# Altium PCB USB-SATA.pcbdoc
Units mm, origin at the board's own origin, x right, y up, seen from the top; angles counter-clockwise.
Board outline 74.37 x 105.1 mm, 4 copper layers (Top Layer, Inner1, Inner2, Bottom Layer); 58 components, 54 nets, 291 pads, 231 vias.
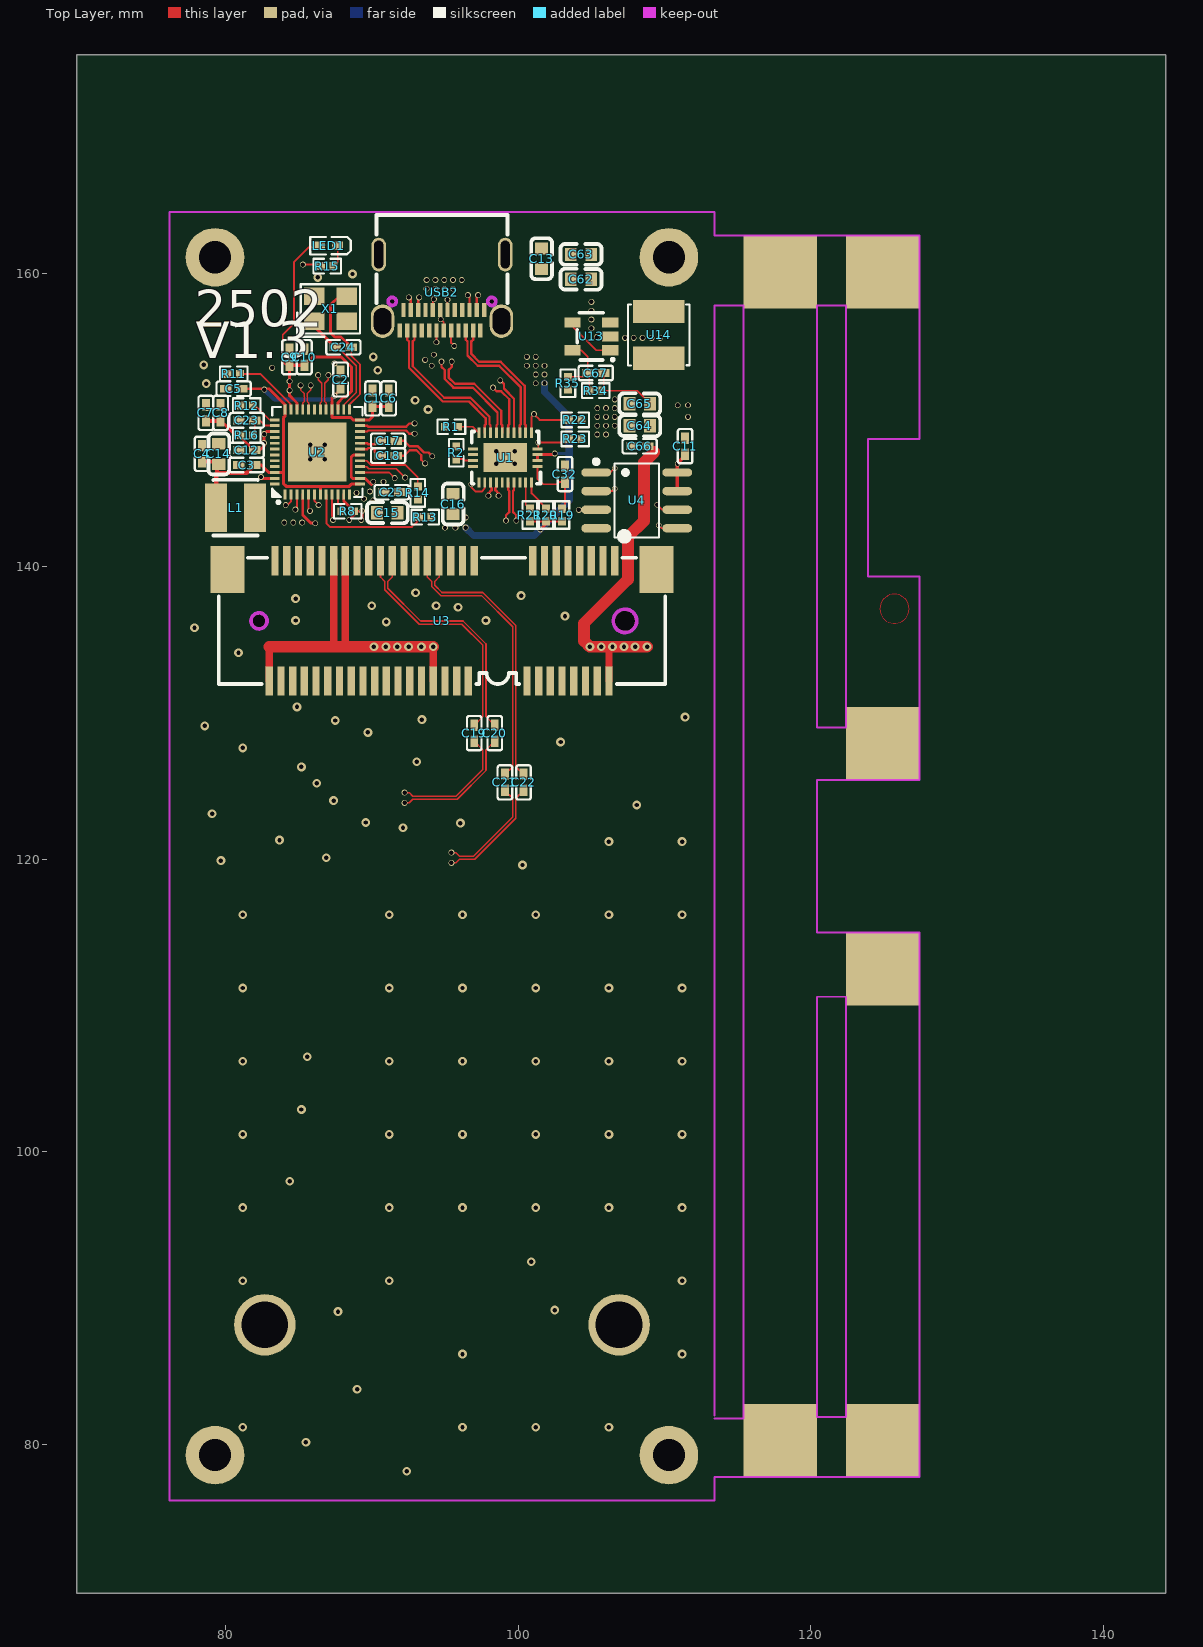
[diagram p0: Top Layer view]
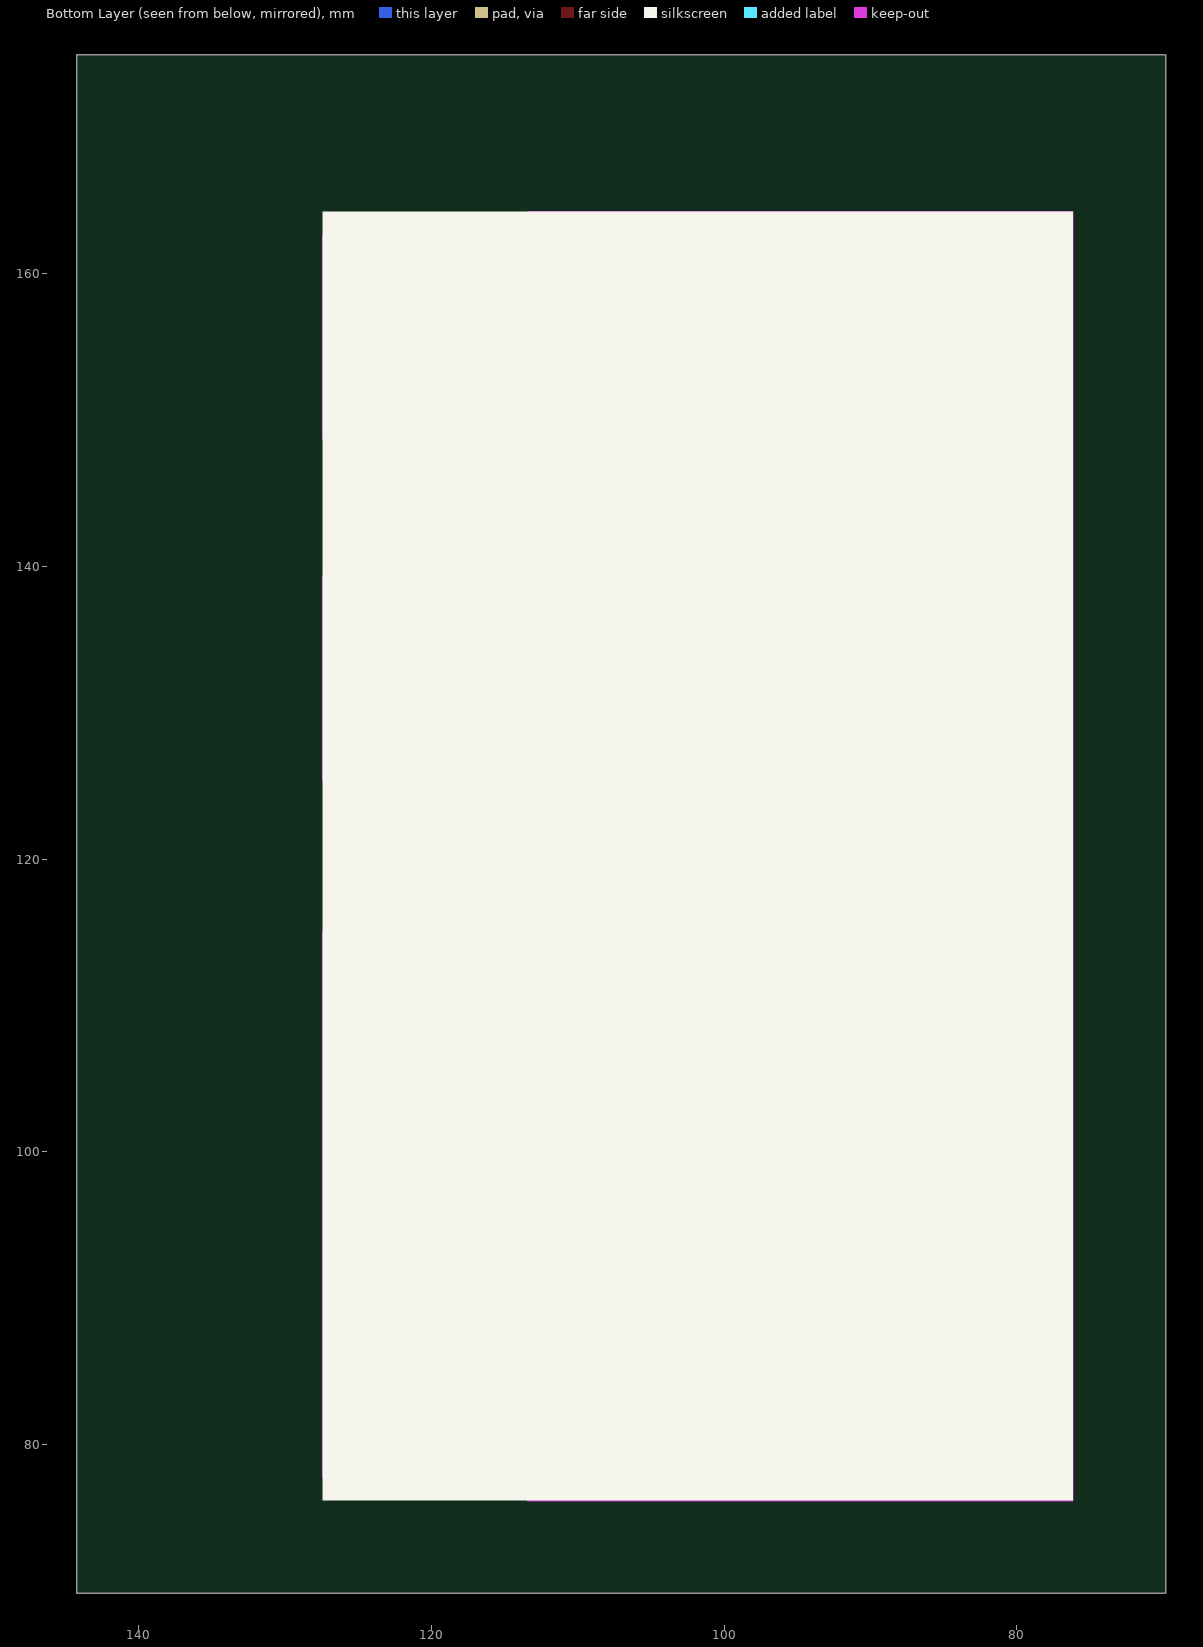
[diagram p1: Bottom Layer view, seen from below]
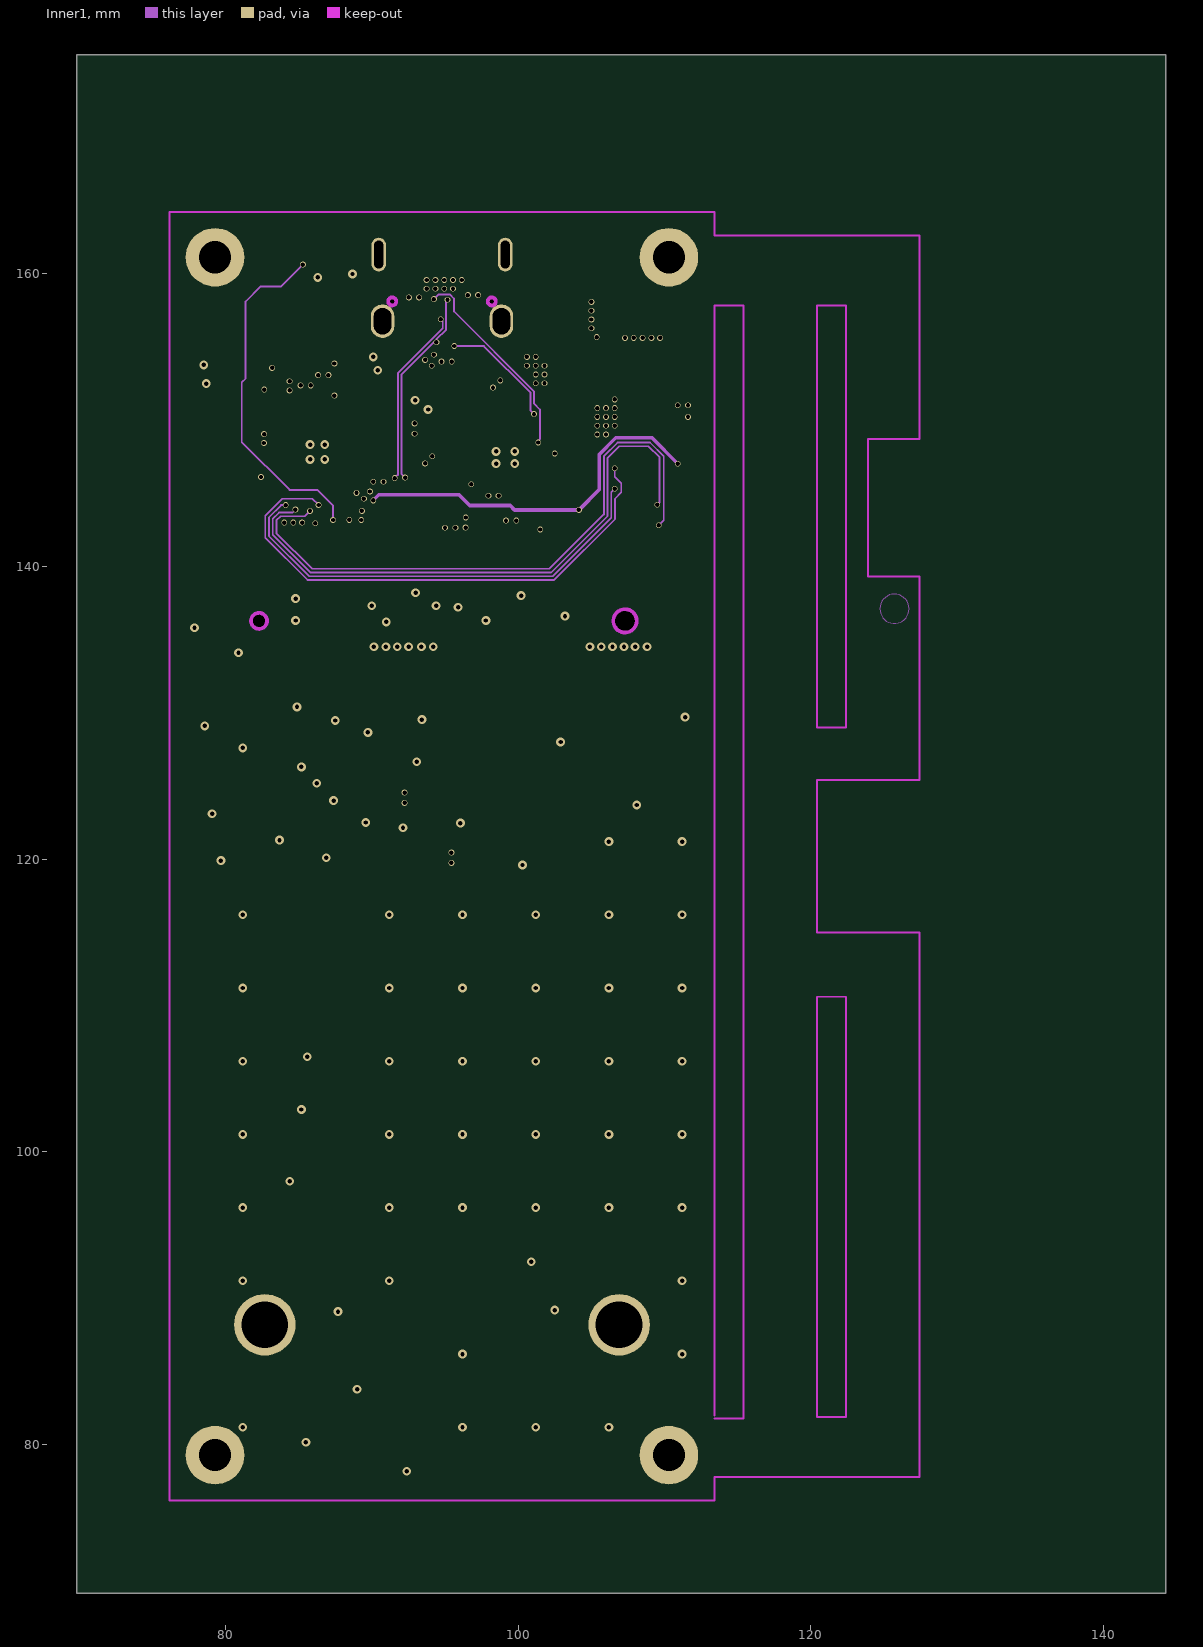
[diagram p2: Inner1]
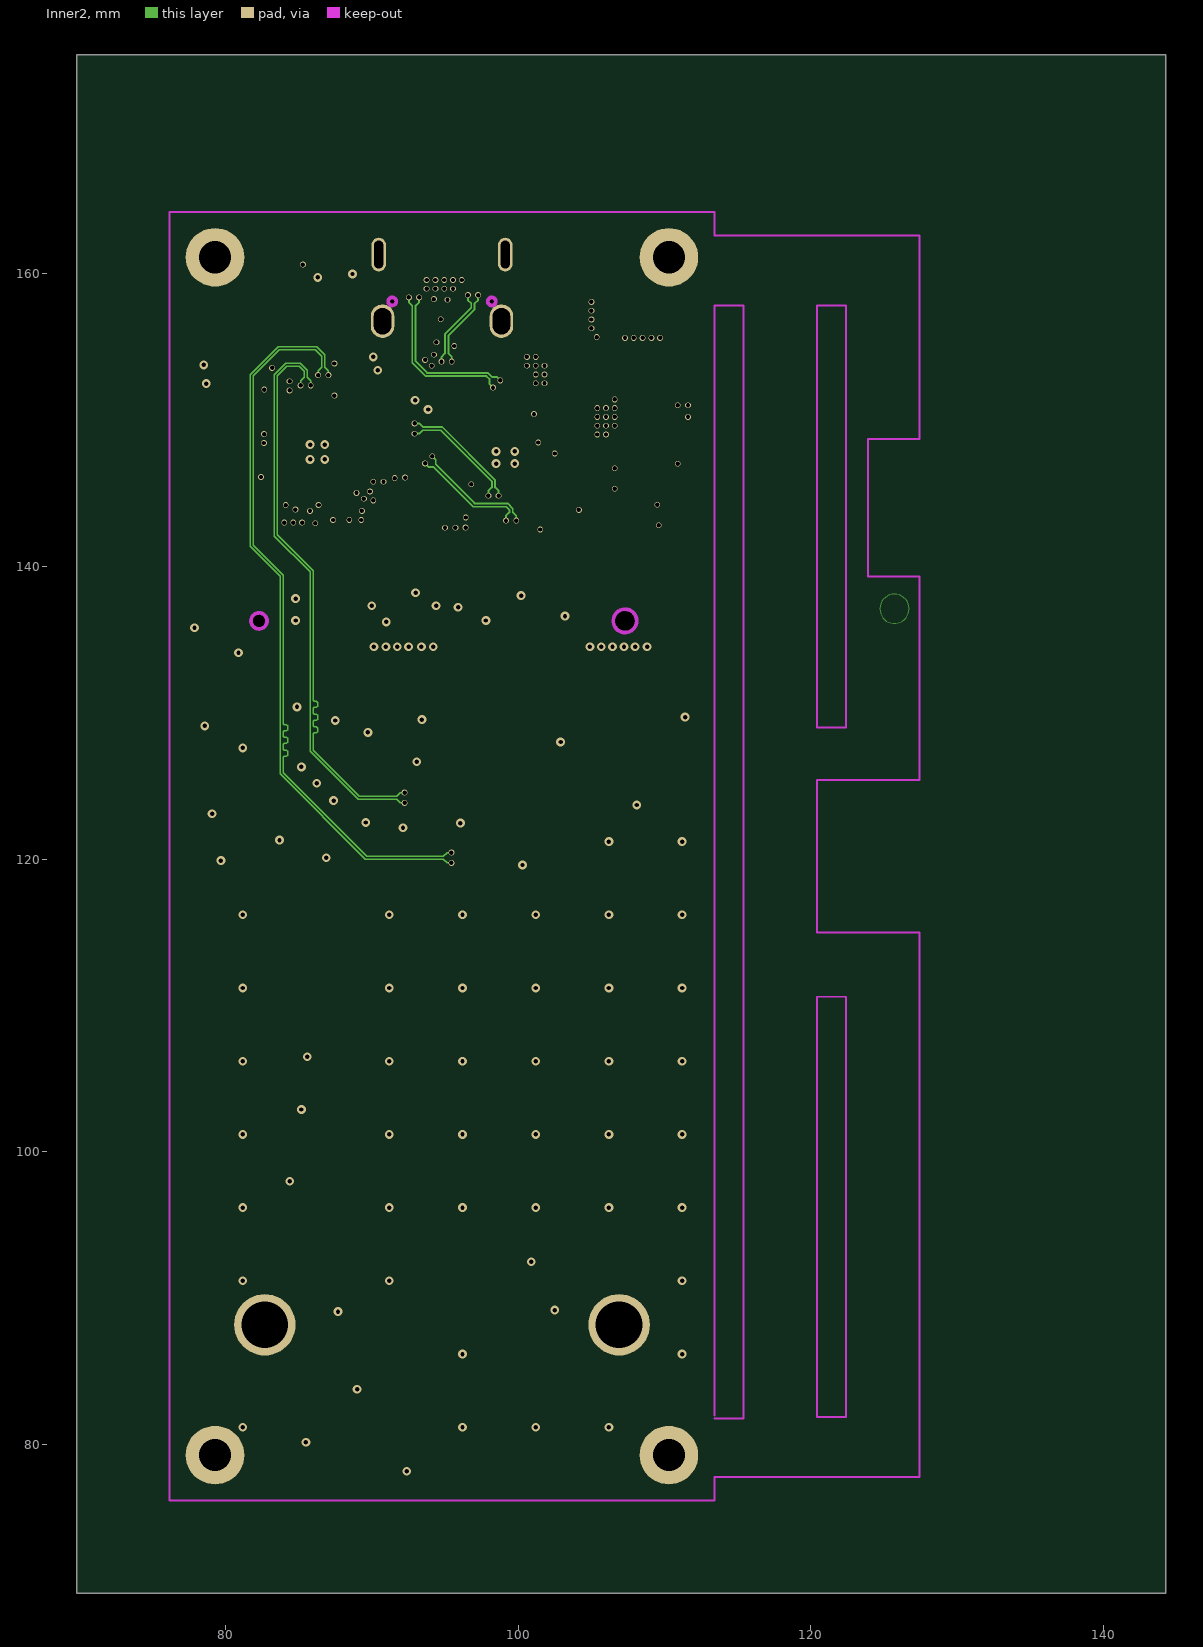
[diagram p3: Inner2]

## Layer stack, top to bottom
Top Layer: signal copper (thickness not stored)
Dielectric: dielectric 0.32, FR-4, Dk 4.8
Inner1: signal copper (thickness not stored)
Dielectric: dielectric 0.32, FR-4, Dk 4.8
Inner2: signal copper (thickness not stored)
Dielectric: dielectric 0.32, FR-4, Dk 4.8
Bottom Layer: signal copper (thickness not stored)

## Board outline
144.22,69.85 69.85,69.85 69.85,174.95 144.22,174.95

## Design rules (kind name [scope] priority, off if disabled: settings)
BoardOutlineClearance safeClearance [All] p0: genericclearance=0.254 ignorepadtopadclearanceinfootprint=FALSE except(0: Track-OutlineEdge SMDPad-OutlineEdge THPad-OutlineEdge Via-OutlineEdge Fill-OutlineEdge Region-OutlineEdge Poly-OutlineEdge Text-OutlineEdge Track-CutoutEdge SMDPad-CutoutEdge THPad-CutoutEdge Via-CutoutEdge Fill-CutoutEdge Region-CutoutEdge Arc-SplitContinuation Track-SplitContinuation SMDPad-SplitContinuation THPad-SplitContinuation Via-SplitContinuation Fill-SplitContinuation Poly-SplitContinuation Region-SplitContinuation Text-SplitContinuation)
Clearance safeClearance [(InNet('GND') OR InNet('CC2') OR InNet('5V') OR InNet('SSTX_P') OR InNet('SSTX_N') OR InNet('SSRX_P') OR InNet('SSRX_N') OR InNet('RX2_P') OR InNet('RX2_N') OR InNet('RX1_N') OR InNet('RX1_P') OR InNet('TX2_P') OR InNet('TX2_N') OR InNet('TX1_N') OR InNet('TX1_P') OR InNet('CC1') OR InNet('D+') OR InNet('D-') OR InNet('I2C_DATA') OR InNet('I2C_CLK') OR InNet('VCC33') OR InNet('GPIO5') OR InNet('GPIO4') OR InNet('VCC12') OR InNet('GPIO3') OR InNet('GPIO2') OR InNet('VBUS_DET') OR InNet('$1N7039') OR InNet('CHIP_SSTX_N') OR InNet('CHIP_SSTX_P') OR InNet('XI') OR InNet('XO') OR InNet('CHIP_SATA_RX_P') OR InNet('CHIP_SATA_RX_N') OR InNet('CHIP_SATA_TX_N') OR InNet('CHIP_SATA_TX_P') OR InNet('GPIO7') OR InNet('GPIO6') OR InNet('RST#') OR InNet('$1N7428') OR InNet('3V3') OR InNet('SATA_TX_P') OR InNet('SATA_TX_N') OR InNet('SATA_RX_N') OR InNet('SATA_RX_P') OR InNet('$1N7831') OR InNet('$1N23194') OR InNet('$1N23616') OR InNet('ATTACHED') OR InNet('VL_CE') OR InNet('CCLOAD0') OR InNet('CCLOAD1') OR InNet('SY1_FB') OR InNet('$1N31844'))] p1: gap=0.178 ignorepadtopadclearanceinfootprint=FALSE except(0: Track-Fill SMDPad-Fill THPad-Fill Via-Fill Fill-Fill Track-Region SMDPad-Region THPad-Region Via-Region Fill-Region Region-Region Track-Poly SMDPad-Poly THPad-Poly Via-Poly Fill-Poly Region-Poly Poly-Poly Track-Text SMDPad-Text THPad-Text Via-Text Fill-Text Region-Text Poly-Text Text-Text Track-Sheet SMDPad-Sheet THPad-Sheet Via-Sheet Fill-Sheet Region-Sheet Poly-Sheet Text-Sheet Track-Hole SMDPad-Hole THPad-Hole Via-Hole Fill-Hole Region-Hole Poly-Hole Text-Hole Sheet-Hole; 0.099: Track-Track Track-SMDPad SMDPad-SMDPad Track-THPad SMDPad-THPad THPad-THPad Track-Via SMDPad-Via THPad-Via; 0.3: Via-Via)
DiffPairsRouting differentialPair [All] p1: maxuncoupledlength=39.4094 minlimit=3.937 maxlimit=3.937 mostfreqgap=3.937 toplayer_minwidth=3.937 toplayer_prefwidth=3.937 toplayer_maxwidth=100 bottomlayer_minwidth=3.937 bottomlayer_prefwidth=3.937 bottomlayer_maxwidth=100 midlayer1_minwidth=3.937 midlayer1_prefwidth=3.937 midlayer1_maxwidth=100 midlayer2_minwidth=3.937 midlayer2_prefwidth=3.937 midlayer2_maxwidth=100
PasteMaskExpansion pasteMaskExpansion [All] p1: expansion=0
PlaneConnect innerPlane [All] p1: planeconnectstyle=Relief reliefexpansion=0.508 reliefentries=4 reliefconductorwidth=0.254 reliefairgap=0.254
PolygonConnect 电源直连 [All] p1: connectstyle=Direct reliefentries=4 reliefconductorwidth=10 polygonreliefangle="90 Angle" airgapwidth=10
RoutingVias viaSize [All] p1: viastyle="Through Hole" holewidth=11.811 minholewidth=11.811 maxholewidth=236.1812 width=15.748 minwidth=15.748 maxwidth=393.7008
SolderMaskExpansion solderMaskExpansion [All] p1: useseparateexpansions=TRUE expansion=4.0157 expansionbottom=4.0157
Width trackWidth [All] p1: maxlimit=100 minlimit=4 preferedwidth=4

## Components (designator, comment, footprint, x,y, rotation, side; value= is the part's Value field where it differs from the comment)
C1 "TCC0402X5R104M250AT" C0402 90.073,151.461 r270 top
C2 "TCC0402X5R104M250AT" C0402 87.886,152.756 r90 top
C3 "TCC0402X5R104M250AT" C0402 81.474,146.916 r180 top
C4 "TCC0402X5R104M250AT" C0402 78.426,147.678 r90 top
C5 "TCC0402X5R104M250AT" C0402 80.585,152.123 r180 top
C6 "TCC0402X5R104M250AT" C0402 91.173,151.461 r90 top
C7 "TCC0402X5R104M250AT" C0402 78.68,150.472 r90 top
C8 "TCC0402X5R104M250AT" C0402 79.696,150.472 r90 top
C9 "TCC0402X5R104M250AT" C0402 84.395,154.282 r90 top
C10 "TCC0402X5R104M250AT" C0402 85.411,154.282 r90 top
C11 "TCC0402X5R104M250AT" C0402 111.409,148.2 r90 top
C12 "TCC0402X5R104M250AT" C0402 81.474,147.932 r180 top
C13 "CL10A106KP8NNNC" C0603 101.609,161 r270 top
C14 "CL10A106KP8NNNC" C0603 79.569,147.678 r90 top
C15 "CL10A106KP8NNNC" C0603 91.073,143.661 r180 top
C16 "CL10A106KP8NNNC" C0603 95.571,144.249 r270 top
C17 "TCC0402X5R104M250AT" C0402 91.126,148.567 r0 top
C18 "TCC0402X5R104M250AT" C0402 91.126,147.551 r0 top
C19 "TCC0402X5R104M250AT" C0402 97.009,128.6 r90 top
C20 "TCC0402X5R104M250AT" C0402 98.409,128.6 r90 top
C21 "TCC0402X5R104M250AT" C0402 99.107,125.238 r90 top
C22 "TCC0402X5R104M250AT" C0402 100.377,125.238 r90 top
C23 "CL05A105KP5NNNC" C0402 81.474,149.964 r0 top
C24 "TCC0402COG100J500AT" C0402 88.071,154.959 r0 top
C25 "TCC0402X5R104M250AT" C0402 91.373,145.061 r0 top
C32 "TCC0402X5R104M250AT" C0402 103.209,146.3 r90 top
C62 "CL10A106KP8NNNC" C0603 104.309,159.6 r0 top
C63 "CL10A106KP8NNNC" C0603 104.309,161.3 r0 top
C64 "CL10A106KP8NNNC" C0603 108.309,149.6 r180 top
C65 "CL10A106KP8NNNC" C0603 108.309,151.1 r180 top
C66 "TCC0402X5R104M250AT" C0402 108.309,148.2 r0 top
C67 "TCC0402COG100J500AT" C0402 105.309,153.2 r0 top
L1 "CKCS3012-4.7uH/M" IND-SMD_L3.0-W3.0-1 80.712,144.007 r180 top
LED1 "VLMW1500-GS08" LED0402-R-RD_WHITE 87.066,161.886 r180 top
R1 "RC-02W2052FT" R0402 95.447,149.529 r0 top
R2 "FRC0402J103 TS" R0402 95.782,147.752 r270 top
R8 "CR0402JF0104G" R0402 88.373,143.761 r180 top
R11 "0402WGJ0472TCE" R0402 80.585,153.139 r180 top
R12 "0402WGJ0472TCE" R0402 81.474,150.98 r180 top
R13 "0402WGJ0472TCE" R0402 93.666,143.36 r0 top
R14 "RC-02W1212FT" R0402 93.158,145.011 r90 top
R15 "RC-02K102JT" R0402 86.974,160.499 r0 top
R16 "CR0402JF0104G" R0402 81.474,148.948 r180 top
R19 "FRC0402J103 TS" R0402 103.009,143.5 r270 top
R20 "FRC0402J103 TS" R0402 101.909,143.5 r270 top
R21 "FRC0402J103 TS" R0402 100.809,143.5 r270 top
R22 "FRC0402F5101TS" R0402 103.909,150 r0 top
R23 "FRC0402F5101TS" R0402 103.909,148.7 r0 top
R34 "0402WGF4533TCE" R0402 105.309,152 r0 top
R35 "CR0402JF0104G" R0402 103.409,152.5 r90 top
U1 "VL160" MQFN-28_L4.5-W3.5-P0.40-BL-EP 99.127,147.424 r180 top
U2 "ASM1153E" QFN-48_L6.0-W6.0-P0.40-BL-EP4.2 86.3,147.805 r0 top
U3 "PCIE-52P70H" PCIE-SMD_52P-P0.80_PCIE-52PXXH 94.809,136.272 r180 top
U4 "MX25L512EMI-10G" SOP-8_L5.0-W4.0-P1.27-LS6.0-BL 108.109,144.5 r270 top
U13 "SY8089A1AAC" TSOT-23-5_L2.9-W1.6-P0.95-LS2.8-BR 105.009,155.7 r0 top
U14 "SFE4030A-4R7M-F-HF" IND-SMD_L4.0-W4.0 109.609,155.8 r270 top
USB2 "TYPE-C 24P QT 143" TYPE-C-SMD_C9900025773 94.809,158.7 r180 top
X1 "X1E0000210621" CRYSTAL-SMD_4P-L3.2-W2.5-BL 87.189,157.584 r0 top

## Footprints (in the part's own frame and the unit in brackets; to place one, negate y for a bottom-side part, rotate by r counter-clockwise, add the part's x,y. Pads: shape width x height; smd on the part's side, far side on the other; paste and mask are expansions set on the pad)
C0402 [mm]
  rect 0.79x0.54 smd: 1(-0.545,0) 2(0.545,0)
  silkscreen extent -1.17,-0.5 1.17,0.5
C0603 [mm]
  rect 0.8x0.9 smd: 1(-0.7,0) 2(0.7,0)
  silkscreen extent -1.41,-0.71 1.39,0.72
CRYSTAL-SMD_4P-L3.2-W2.5-BL [mm]
  rect 1.4x1.2 smd: 1(-1.1,-0.85) 2(1.1,-0.85) 3(1.1,0.85) 4(-1.1,0.85)
  silkscreen extent -2.26,-1.91 2.03,1.68
IND-SMD_L3.0-W3.0-1 [mm]
  rect 1.501x3.32 smd: 1(1.328,0) 2(-1.328,0)
  silkscreen extent -1.52,-1.91 1.52,1.91
IND-SMD_L4.0-W4.0 [mm]
  rect 1.6x3.5 smd: 1(-1.6,0) 2(1.6,0)
  silkscreen extent -2.08,-2.1 2.08,2.1
LED0402-R-RD_WHITE [mm]
  rect 0.75x0.6 smd: 1(0.623,0) 2(-0.623,0)
  silkscreen extent -1.51,-0.61 1.26,0.58
MQFN-28_L4.5-W3.5-P0.40-BL-EP [mm]
  rect 0.201x0.701 smd: 1(-1.801,-1.699) 2(-1.4,-1.699) 3(-1.001,-1.699) 4(-0.599,-1.699) 5(-0.201,-1.699) 6(0.201,-1.699) 7(0.599,-1.699) 8(1.001,-1.699) 9(1.4,-1.699) 10(1.801,-1.699) 15(1.801,1.699) 16(1.4,1.699) 17(1.001,1.699) 18(0.599,1.699) 19(0.201,1.699) 20(-0.201,1.699) 21(-0.599,1.699) 22(-1.001,1.699) 23(-1.4,1.699) 24(-1.801,1.699)
  rect 0.701x0.201 smd: 11(2.2,-0.599) 12(2.2,-0.201) 13(2.2,0.201) 14(2.2,0.599) 25(-2.2,0.599) 26(-2.2,0.201) 27(-2.2,-0.201) 28(-2.2,-0.599)
  rect 3x1.999 smd: 29(0,0)
  silkscreen extent -2.41,-1.78 2.29,1.78
PCIE-SMD_52P-P0.80_PCIE-52PXXH [mm]
  rect 0.5x2 smd: 1(-11.8,-4.1) 2(-11.4,4.1) 3(-11,-4.1) 4(-10.6,4.1) 5(-10.2,-4.1) 6(-9.8,4.1) 7(-9.4,-4.1) 8(-9,4.1) 9(-8.6,-4.1) 10(-8.2,4.1) 11(-7.8,-4.1) 12(-7.4,4.1) 13(-7,-4.1) 14(-6.6,4.1) 15(-6.2,-4.1) 16(-5.8,4.1) 17(-2.2,-4.1) 18(-1.8,4.1) 19(-1.4,-4.1) 20(-1,4.1) 21(-0.6,-4.1) 22(-0.2,4.1) 23(0.2,-4.1) 24(0.6,4.1) 25(1,-4.1) 26(1.4,4.1) 27(1.8,-4.1) 28(2.2,4.1) 29(2.6,-4.1) 30(3,4.1) 31(3.4,-4.1) 32(3.8,4.1) 33(4.2,-4.1) 34(4.6,4.1) 35(5,-4.1) 36(5.4,4.1) 37(5.8,-4.1) 38(6.2,4.1) 39(6.6,-4.1) 40(7,4.1) 41(7.4,-4.1) 42(7.8,4.1) 43(8.2,-4.1) 44(8.6,4.1) 45(9,-4.1) 46(9.4,4.1) 47(9.8,-4.1) 48(10.2,4.1) 49(10.6,-4.1) 50(11,4.1) 51(11.4,-4.1) 52(11.8,4.1)
  rect 2.3x3.2 smd: 53(14.65,-3.5) 54(-14.65,-3.5)
  Board Outline Layer circle w0.005: c-12.5,0 r0.8
  Board Outline Layer circle w0.005: c12.5,0 r0.55
  Board Outline Layer circle w0.254: c-12.5,0 r0.8
  Board Outline Layer circle w0.254: c12.5,0 r0.55
  Multi-Layer board cut-out: -13.3,0 -13.221,-0.347 -12.999,-0.625 -12.678,-0.78 -12.322,-0.78 -12.001,-0.625 -11.779,-0.347 -11.7,0 -11.7,0 -11.779,0.347 -12.001,0.626 -12.322,0.78 -12.678,0.78 -12.999,0.626 -13.221,0.347 -13.3,0
  Multi-Layer board cut-out: 11.95,0 12.004,-0.239 12.157,-0.43 12.377,-0.536 12.622,-0.536 12.843,-0.43 12.995,-0.239 13.05,0 13.05,0 12.976,0.275 12.775,0.476 12.5,0.55 12.225,0.476 12.024,0.275 11.95,0
  silkscreen extent -15.24,-6.02 15.24,4.32
QFN-48_L6.0-W6.0-P0.40-BL-EP4.2 [mm]
  rect 0.2x0.665 smd: 1(-2.2,-2.908) 2(-1.8,-2.908) 3(-1.4,-2.908) 4(-1,-2.908) 5(-0.6,-2.908) 6(-0.2,-2.908) 7(0.2,-2.908) 8(0.6,-2.908) 9(1,-2.908) 10(1.4,-2.908) 11(1.8,-2.908) 12(2.2,-2.908) 25(2.2,2.908) 26(1.8,2.908) 27(1.4,2.908) 28(1,2.908) 29(0.6,2.908) 30(0.2,2.908) 31(-0.2,2.908) 32(-0.6,2.908) 33(-1,2.908) 34(-1.4,2.908) 35(-1.8,2.908) 36(-2.2,2.908)
  rect 0.665x0.2 smd: 13(2.908,-2.2) 14(2.908,-1.8) 15(2.908,-1.4) 16(2.908,-1) 17(2.908,-0.6) 18(2.908,-0.2) 19(2.908,0.2) 20(2.908,0.6) 21(2.908,1) 22(2.908,1.4) 23(2.908,1.8) 24(2.908,2.2) 37(-2.908,2.2) 38(-2.908,1.8) 39(-2.908,1.4) 40(-2.908,1) 41(-2.908,0.6) 42(-2.908,0.2) 43(-2.908,-0.2) 44(-2.908,-0.6) 45(-2.908,-1) 46(-2.908,-1.4) 47(-2.908,-1.8) 48(-2.908,-2.2)
  rect 4x4 smd: 49(0,0)
  silkscreen extent -3.08,-3.53 3.08,3.08
R0402 [mm]
  rect 0.566x0.54 smd: 1(-0.433,0) 2(0.433,0)
  silkscreen extent -0.94,-0.5 0.94,0.5
SOP-8_L5.0-W4.0-P1.27-LS6.0-BL [mm]
  oval 0.574x2.036 smd: 1(-1.905,-2.768) 2(-0.635,-2.768) 3(0.635,-2.768) 4(1.905,-2.768) 5(1.905,2.768) 6(0.635,2.768) 7(-0.635,2.768) 8(-1.905,2.768)
  silkscreen extent -2.79,-2.92 2.53,1.52
TSOT-23-5_L2.9-W1.6-P0.95-LS2.8-BR [mm]
  rect 1.1x0.7 smd: 1(1.294,-0.951) 2(1.294,-0.001) 3(1.294,0.951) 4(-1.294,0.951) 5(-1.294,-0.949)
  silkscreen extent -0.97,-1.65 1.52,1.61
TYPE-C-SMD_C9900025773 [mm]
  oval 1x2.3 hole 0.6 slot 1.9 at 90 deg: 15(-4.32,-2.588) 16(4.32,-2.588)
  oval 1.6x2.3 hole 1.2 slot 1.8 at 90 deg: 17(4.06,1.962) 18(-4.06,1.962)
  rect 0.3x0.95 smd: A1(-2.625,2.588) A2(-2.125,2.588) A3(-1.625,2.588) A4(-1.125,2.588) A5(-0.625,2.588) A6(-0.125,2.588) A7(0.375,2.588) A8(0.875,2.588) A9(1.375,2.588) A10(1.875,2.588) A11(2.375,2.588) A12(2.875,2.588) B1(2.625,1.188) B2(2.125,1.188) B3(1.625,1.188) B4(1.125,1.188) B5(0.625,1.188) B6(0.125,1.188) B7(-0.375,1.188) B8(-0.875,1.188) B9(-1.375,1.188) B10(-1.875,1.188) B11(-2.375,1.188) B12(-2.875,1.188)
  Board Outline Layer circle w0.005: c-3.4,0.612 r0.275
  Board Outline Layer circle w0.005: c3.4,0.612 r0.275
  Board Outline Layer circle w0.254: c-3.4,0.612 r0.275
  Board Outline Layer circle w0.254: c3.4,0.612 r0.275
  Multi-Layer board cut-out: -3.675,0.612 -3.648,0.493 -3.571,0.397 -3.461,0.344 -3.339,0.344 -3.229,0.397 -3.152,0.493 -3.125,0.612 -3.125,0.612 -3.162,0.75 -3.263,0.85 -3.4,0.887 -3.538,0.85 -3.638,0.75 -3.675,0.612
  Multi-Layer board cut-out: 3.125,0.612 3.152,0.493 3.229,0.397 3.339,0.344 3.461,0.344 3.572,0.397 3.648,0.493 3.675,0.612 3.675,0.612 3.638,0.75 3.538,0.85 3.4,0.887 3.263,0.85 3.162,0.75 3.125,0.612
  silkscreen extent -4.47,-5.29 4.47,0.74

## Free pads (board coordinates)
  round 4.2 hole 3.2: 1(82.709,88.2) 2(106.909,88.2)
  round 4 hole 2.2: 3(110.309,161.1) 3(110.309,79.3) 4(79.309,161.1) 4(79.309,79.3)
  rect 5x5 smd: 14(124.909,127.9) 15(124.909,160.1) 15(124.909,80.3) 16(117.909,80.3) 16(124.909,112.5) 19(117.909,160.1)

## Via types
v1: diameter 0.4, hole 0.3, Top Layer to Bottom Layer, 120 vias
v2: diameter 0.6, hole 0.3, Top Layer to Bottom Layer, 107 vias
v3: diameter 0.61, hole 0.305, Top Layer to Bottom Layer, 4 vias

## Nets (pads, with @x,y where several pads share a name; then routed paths per layer and width w, separated by ;. In a path a pad name is that pad's centre, name@x,y a point inside that pad or via, vN(x,y) a via of type N, cw(c..) or ccw(c..) an arc to the next point about the centre after c; other vN are vias at no path point)
3V3: C64.1 C65.1 C66.2 C67.2 R34.2 U3.2 U3.24 U3.39 U3.41 U3.52 U14.2 | length 54.2
  Top Layer w0.1: C67.2 105.854,152.112 R34.2 108.159,152 109.009,151.15 C65.1
  Top Layer w0.5: U3.52 83.009,134.491 83.02,134.502 ; U3.41 87.409,134.504 87.411,134.502 ; 88.203,134.502 88.209,134.508 U3.39 ; v2(94.207,134.502) 94.207,132.174 U3.24 ; U3.2 v2@106.209,134.502
  Top Layer w0.8: 83.02,134.502 87.411,134.502 88.203,134.502 v2(90.159,134.502) v2(90.981,134.502) v2(91.747,134.502) v2(92.531,134.502) v2(93.402,134.502) v2(94.207,134.502) ; v2(108.814,134.502) v2(107.996,134.502) v2(107.239,134.502) v2(106.455,134.502) v2(105.684,134.502) v2(104.909,134.502) 104.509,134.902 104.509,136.1 107.509,139.1 107.509,142 108.609,143.1 108.609,147.1 109.309,147.8
5V: C13.2 C16.2 C62.1 C63.1 R8.1 R19.2 R20.2 R21.2 U1.26 U1.27 U2.1 U2.11 U13.1 U13.4 USB2.A4 USB2.A9 USB2.B4 USB2.B9 | length 29.4
  Top Layer w0.1: U13.4 103.715,156.394 105.36,154.749 U13.1
  Top Layer w0.127: R21.2 R20.2 R19.2
  Top Layer w0.2: U2.11 88.1,144.467 R8.1 ; v1(88.478,143.17) 88.806,143.498 R8.1 ; v1(89.299,143.162) 89.334,143.197 v1(89.334,143.785) 89.31,143.761 R8.1 ; U1.26 U1.27 102.434,147.625 v1(102.509,147.7) ; v1(101.523,142.514) 101.909,142.9 R20.2
  Bottom Layer w0.2: v1(102.509,147.7) 103.509,147.7
  Bottom Layer w0.5: v1(96.425,142.641) 96.966,142.1 101.109,142.1 v1(101.523,142.514) 103.509,144.5 103.509,147.7 103.509,150.2 101.809,151.9 v1(101.809,152.5)
  other v1: 95.017,142.633 95.725,142.633 84.041,142.979 84.649,142.979 85.257,142.979 96.433,143.333 101.209,152.5 101.209,153.1 101.809,153.1 94.109,153.7 100.609,153.7 101.209,153.7 101.809,153.7 93.659,154.1 100.609,154.3 101.209,154.3 94.259,154.45 93.759,158.95 94.359,158.95 94.959,158.95 95.559,158.95 93.759,159.55 94.359,159.55 94.959,159.55 95.559,159.55 96.159,159.55
$1N7039: R14.2 U2.17 | length 5.1
  Top Layer w0.127: U2.17 89.676,147.205 89.968,146.913 92.337,146.913 93.158,146.092 R14.2
$1N7428: L1.2 U2.48
$1N7831: LED1.2 R15.2 | length 1.5
  Top Layer w0.127: R15.2 87.689,160.781 LED1.2
$1N23194: R1.2 U1.10 | length 1.6
  Top Layer w0.127: R1.2 96.92,149.529 U1.10
$1N23616: R2.2 U1.13 | length 1.2
  Top Layer w0.127: R2.2 96.274,147.319 96.37,147.223 U1.13
$1N31844: U13.3 U14.1
ATTACHED: U1.16 | length 1.7
  Top Layer w0.127: v1(96.809,145.6) 96.809,145.4 97.109,145.1 97.509,145.1 97.727,145.318 U1.16
CC1: R22.1 U1.1 USB2.A5 | length 13.1
  Top Layer w0.127: USB2.A5 95.434,155.256 v1(95.649,155.041) ; U1.1 100.919,149.132 100.919,150.194 101.089,150.364 v1(101.089,150.389) 101.478,150 R22.1
  Inner1 w0.127: v1(95.649,155.041) 97.668,155.041 100.855,151.854 100.855,150.625 v1@101.089,150.391
CC2: R23.1 U1.28 USB2.B5 | length 17.3
  Top Layer w0.127: USB2.B5 94.184,158.175 v1(94.259,158.25) ; U1.28 101.385,148.082 v1(101.385,148.457) 103.233,148.457 R23.1
  Inner1 w0.127: v1(94.259,158.25) 94.573,158.564 95.346,158.564 95.628,158.281 95.628,157.402 101.082,151.948 101.082,151.119 101.502,150.699 101.502,148.686 101.385,148.568 v1(101.385,148.457)
CCLOAD0: R20.1 U1.24 | length 2.2
  Top Layer w0.127: U1.24 100.928,144.981 101.909,144 R20.1
CCLOAD1: R21.1 U1.23 | length 1.9
  Top Layer w0.127: U1.23 100.527,144.215 R21.1
CHIP_SATA_RX_N: C21.1 U2.30 | length 60.2
  Top Layer w0.11: v1(86.35,153.055) 86.35,152.745 86.595,152.5 86.595,151.25 86.5,151.155 U2.30 ; v1(95.454,120.445) 95.764,120.445 96.009,120.2 96.959,120.2 99.637,122.878 99.637,124.163 C21.1
  Inner2 w0.1: v1(86.35,153.055) 86.35,153.355 86.6,153.605 86.6,154.359 86.159,154.8 83.709,154.8 81.909,153 81.909,141.45 83.959,139.4 83.959,129.253 84.03,129.182 84.188,129.182 84.259,129.111 84.259,128.853 84.188,128.782 84.03,128.782 83.959,128.711 83.959,128.382 84.03,128.311 84.188,128.311 84.259,128.241 84.259,127.982 84.188,127.911 84.03,127.911 83.959,127.841 83.959,127.511 84.03,127.441 84.188,127.441 84.259,127.37 84.259,127.111 84.188,127.041 84.03,127.041 83.959,126.97 83.959,125.9 89.664,120.195 94.904,120.195 95.154,120.445 v1(95.454,120.445)
CHIP_SATA_RX_P: C22.1 U2.29 | length 60.2
  Top Layer w0.11: U2.29 86.9,151.155 86.805,151.25 86.805,152.5 87.05,152.745 v1(87.05,153.055) ; v1(95.454,119.745) 95.764,119.745 96.009,119.99 97.046,119.99 99.847,122.791 99.847,124.163 C22.1
  Inner2 w0.1: v1(87.05,153.055) 87.05,153.355 86.8,153.605 86.8,154.442 86.242,155 83.626,155 81.709,153.083 81.709,141.367 83.759,139.317 83.759,125.817 89.581,119.995 94.904,119.995 95.154,119.745 v1(95.454,119.745)
CHIP_SATA_TX_N: C20.1 U2.32 | length 49
  Top Layer w0.11: U2.32 85.7,151.155 85.605,151.25 85.605,151.8 85.85,152.045 v1(85.85,152.355) ; v1(92.254,123.845) 92.564,123.845 92.809,124.09 95.846,124.09 97.814,126.058 97.814,127.46 C20.1
  Inner2 w0.1: v1(85.85,152.355) 85.85,152.655 85.6,152.905 85.6,153.392 85.142,153.85 84.126,153.85 83.359,153.083 83.359,142.067 85.809,139.617 85.809,127.367 89.081,124.095 91.704,124.095 91.954,123.845 v1(92.254,123.845)
CHIP_SATA_TX_P: C19.1 U2.33 | length 49
  Top Layer w0.11: v1(85.15,152.355) 85.15,152.045 85.395,151.8 85.395,151.25 85.3,151.155 U2.33 ; v1(92.254,124.545) 92.564,124.545 92.809,124.3 95.759,124.3 97.604,126.145 97.604,127.46 C19.1
  Inner2 w0.1: v1(85.15,152.355) 85.15,152.655 85.4,152.905 85.4,153.309 85.059,153.65 84.209,153.65 83.559,153 83.559,142.15 86.009,139.7 86.009,130.837 86.08,130.766 86.238,130.766 86.309,130.695 86.309,130.437 86.238,130.366 86.08,130.366 86.009,130.295 86.009,129.966 86.08,129.895 86.238,129.895 86.309,129.825 86.309,129.566 86.238,129.495 86.08,129.495 86.009,129.425 86.009,129.095 86.08,129.025 86.238,129.025 86.309,128.954 86.309,128.695 86.238,128.625 86.08,128.625 86.009,128.554 86.009,127.45 89.164,124.295 91.704,124.295 91.954,124.545 v1(92.254,124.545)
CHIP_SSTX_N: C18.1 U2.19 | length 1.7
  Top Layer w0.161: U2.19 89.701,148.005 89.771,148.074 90.109,148.074 90.206,147.977 90.206,147.818 90.473,147.551 C18.1
CHIP_SSTX_P: C17.1 U2.20 | length 1.5
  Top Layer w0.161: U2.20 89.701,148.405 89.771,148.335 90.241,148.335 90.473,148.567 C17.1
D+: U2.15 USB2.A6 USB2.B6 | length 16.3
  Top Layer w0.1: USB2.B6 94.727,157.469 v1(94.727,156.868) 94.934,156.661 USB2.A6
  Top Layer w0.127: U2.15 91.198,146.405 v1(91.579,146.024)
  Inner1 w0.127: v1(91.579,146.024) 91.794,146.239 91.794,153.185 94.864,156.255 94.864,156.732 v1(94.727,156.868)
D-: U2.16 USB2.A7 USB2.B7 | length 18.6
  Top Layer w0.1: USB2.B7 v1(95.184,158.2)
  Top Layer w0.127: U2.16 89.216,146.796 89.684,146.796 89.821,146.659 91.687,146.659 v1(92.293,146.053) ; v1(94.427,155.304) 94.434,155.311 USB2.A7
  Inner1 w0.127: v1(92.293,146.053) 92.048,146.298 92.048,153.118 94.234,155.304 v1(94.427,155.304) 94.427,155.497 95.091,156.161 95.091,158.107 v1(95.184,158.2)
GND: C1.1 C2.2 C3.2 C4.2 C5.2 C6.2 C7.2 C8.2 C9.2 C10.2 C11.2 C12.2 C13.1 C14.2 C15.1 C16.1 C23.1 C25.2 C32.2 C62.2 C63.2 C64.2 C65.2 C66.1 pad.1 pad.2 pad.3 pad.4 pad.14 pad.15 pad.16 pad.19 R1.1 R2.1 R11.2 R12.2 R13.2 R14.1 R22.2 R23.2 R35.1 U1.19 U1.29 U2.21 U2.31 U2.47 U2.49 U3.4 U3.9 U3.15 U3.18 U3.21 U3.26 U3.27 U3.29 U3.34 U3.35 U3.37 U3.40 U3.43 U3.50 U3.53 U3.54 U4.4 U13.2 USB2.15 USB2.16 USB2.17 USB2.18 USB2.A1 USB2.A12 USB2.B1 USB2.B12 X1.2 X1.4 | length 1
  Top Layer w0.2: v1(82.448,146.1) 82.543,146.005 U2.47
  other v1: 105.409,149 106.009,149 105.409,149.6 106.009,149.6 106.609,149.6 105.409,150.2 106.009,150.2 106.609,150.2 111.609,150.2 105.409,150.8 106.009,150.8 106.609,150.8 110.909,151 111.609,151 106.609,151.4 83.209,153.55 87.463,153.85 107.309,155.6 107.909,155.6 108.509,155.6 109.109,155.6 109.709,155.6 105.379,155.653 105.009,156.253 105.009,156.853 105.009,157.453 105.009,158.053
  other v2: 92.409,78.2 85.516,80.182 81.209,81.2 96.209,81.2 101.209,81.2 106.209,81.2 89.009,83.8 96.209,86.2 111.209,86.2 87.709,89.1 102.509,89.2 81.209,91.2 91.209,91.2 111.209,91.2 100.909,92.5 81.209,96.2 91.209,96.2 96.209,96.2 101.209,96.2 106.209,96.2 111.209,96.2 84.409,98 81.209,101.2 91.209,101.2 96.209,101.2 101.209,101.2 106.209,101.2 111.209,101.2 85.209,102.9 81.209,106.2 91.209,106.2 96.209,106.2 101.209,106.2 106.209,106.2 111.209,106.2 85.609,106.5 81.209,111.2 91.209,111.2 96.209,111.2 101.209,111.2 106.209,111.2 111.209,111.2 81.209,116.2 91.209,116.2 96.209,116.2 101.209,116.2 106.209,116.2 111.209,116.2 100.309,119.6 79.709,119.9 86.909,120.1 106.209,121.2 111.209,121.2 83.709,121.3 92.148,122.147 96.068,122.461 89.609,122.5 79.109,123.1 108.109,123.7 87.409,124 86.259,125.181 85.209,126.3 93.088,126.644 81.209,127.6 102.909,128 89.748,128.656 78.609,129.1 87.52,129.466 93.437,129.531 111.409,129.7 84.909,130.4 80.909,134.1 77.909,135.8 91.009,136.2 84.809,136.3 97.809,136.3 103.209,136.6 95.909,137.2 90.009,137.3 94.409,137.3 84.809,137.792 100.209,138 93.009,138.2 98.502,147.01 99.772,147.01 98.502,147.845 99.772,147.845 93.86,150.709 92.971,151.334 78.705,152.477 90.427,153.393 78.544,153.753 90.109,154.3 86.323,159.729 88.699,159.963
  other v3: 85.8,147.305 86.8,147.305 85.8,148.305 86.8,148.305
GPIO2: R15.1 U2.9 | length 26.7
  Top Layer w0.127: v1(85.309,160.6) 86.44,160.6 R15.1 ; U2.9 87.3,143.434 87.373,143.361 v1(87.373,143.161)
  Inner1 w0.127: v1(85.309,160.6) 83.806,159.097 82.406,159.097 81.389,158.08 81.389,152.815 81.135,152.561 81.135,148.477 84.397,145.215 86.29,145.215 87.373,144.132 v1(87.373,143.161)
GPIO3: R13.1 U2.8 | length 8.8
  Top Layer w0.127: U2.8 86.932,144.865 86.932,142.901 87.148,142.686 92.761,142.686 93.233,143.158 R13.1
GPIO4: U2.6 U4.1 | length 38.7
  Top Layer w0.127: U2.6 86.1,144.469 v1(86.382,144.187) ; U4.1 106.314,146.405 v1(106.609,146.7)
  Inner1 w0.127: v1(86.382,144.187) 85.952,144.617 83.906,144.617 82.74,143.451 82.74,141.948 85.623,139.065 102.464,139.065 106.623,143.225 106.623,144.614 107.05,145.04 107.05,145.659 106.609,146.1 v1(106.609,146.7)
GPIO5: U2.5 U4.5 | length 44.5
  Top Layer w0.127: U2.5 85.7,143.879 v1(85.797,143.782) ; v1(109.609,142.8) 109.814,142.595 U4.5
  Inner1 w0.127: v1(85.797,143.782) 85.434,143.42 83.786,143.42 83.502,143.135 83.502,142.264 85.939,139.827 102.148,139.827 105.861,143.541 105.861,147.512 106.804,148.454 109.014,148.454 109.95,147.519 109.95,143.14 v1(109.609,142.8)
GPIO6: R12.1 U2.37 | length 1.9
  Top Layer w0.127: R12.1 82.054,150.98 83.029,150.005 U2.37
GPIO7: R11.1 U2.35 | length 4.7
  Top Layer w0.127: R11.1 82.395,153.139 84.473,151.061 84.473,150.739 U2.35
I2C_CLK: U2.3 U4.6 | length 42.5
  Top Layer w0.127: v1(84.8,143.872) 84.9,143.972 U2.3 ; v1(109.509,144.2) 109.844,143.865 U4.6
  Inner1 w0.127: v1(84.8,143.872) 84.601,143.674 83.681,143.674 83.248,143.24 83.248,142.159 85.834,139.573 102.253,139.573 106.115,143.435 106.115,147.406 106.909,148.2 108.909,148.2 109.674,147.435 109.674,144.365 v1(109.509,144.2)
I2C_DATA: U2.2 U4.2 | length 33.3
  Top Layer w0.127: v1(84.136,144.176) 84.235,144.176 84.5,144.441 U2.2 ; U4.2 106.444,145.135 v1(106.609,145.3)
  Inner1 w0.127: v1(84.136,144.176) 83.825,144.176 82.994,143.345 82.994,142.054 85.729,139.319 102.358,139.319 106.369,143.33 106.369,145.06 v1(106.609,145.3)
RST#: C23.2 R16.1 U2.38 | length 2.6
  Top Layer w0.127: R16.1 82.019,149.06 C23.2 82.37,149.964 82.729,149.605 U2.38
RX1_N: U1.7 USB2.B10 | length 13.8
  Top Layer w0.161: v1(94.779,153.981) 94.779,153.62 94.998,153.4 94.998,152.792 95.59,152.2 96.909,152.2 98.596,150.513 98.596,149.704 98.528,149.635 U1.7 ; v1(96.574,158.515) 96.684,158.405 USB2.B10
  Inner2 w0.13: v1(94.779,153.981) 94.779,154.311 95.014,154.546 95.014,155.845 96.809,157.641 96.809,157.95 96.574,158.185 v1(96.574,158.515)
RX1_P: U1.6 USB2.B11 | length 13.8
  Top Layer w0.161: v1(95.479,153.981) 95.479,153.62 95.259,153.4 95.259,152.9 95.698,152.461 97.017,152.461 98.857,150.621 98.857,149.704 98.926,149.635 U1.6 ; USB2.B11 97.184,158.425 v1(97.274,158.515)
  Inner2 w0.13: v1(95.479,153.981) 95.479,154.311 95.244,154.546 95.244,155.75 97.039,157.546 97.039,157.95 97.274,158.185 v1(97.274,158.515)
RX2_N: U1.8 USB2.A10 | length 10.3
  Top Layer w0.161: USB2.A10 92.934,155.476 92.815,155.357 92.815,153.664 94.967,151.511 96.754,151.511 98.057,150.208 98.057,149.704 98.126,149.635 U1.8
RX2_P: U1.9 USB2.A11 | length 10.3
  Top Layer w0.161: USB2.A11 92.434,155.476 92.554,155.357 92.554,153.555 94.859,151.25 96.646,151.25 97.796,150.1 97.796,149.704 97.727,149.635 U1.9
SATA_RX_N: C21.2 U3.25 | length 18.9
  Top Layer w0.11: U3.25 93.809,139.262 94.104,138.967 94.104,138.613 94.717,138 97.509,138 99.637,135.872 99.637,126.313 C21.2
SATA_RX_P: C22.2 U3.23 | length 18.9
  Top Layer w0.11: U3.23 94.609,139.262 94.314,138.967 94.314,138.7 94.804,138.21 97.596,138.21 99.847,135.959 99.847,126.313 C22.2
SATA_TX_N: C20.2 U3.31 | length 16.1
  Top Layer w0.11: U3.31 91.409,139.262 91.114,138.967 91.114,138.492 93.346,136.26 96.246,136.26 97.814,134.692 97.814,129.74 C20.2
SATA_TX_P: C19.2 U3.33 | length 16.1
  Top Layer w0.11: U3.33 90.609,139.262 90.904,138.967 90.904,138.405 93.259,136.05 96.159,136.05 97.604,134.605 97.604,129.74 C19.2
SSRX_N: U1.17 U2.22 | length 12.8
  Top Layer w0.161: U2.22 89.701,149.205 89.771,149.275 92.359,149.275 92.579,149.055 v1(92.94,149.055) ; v1(97.977,144.82) 97.977,144.981 98.196,145.2 98.196,145.343 98.126,145.413 U1.17
  Inner2 w0.13: v1(92.94,149.055) 93.27,149.055 93.505,149.29 94.714,149.29 98.212,145.792 98.212,145.385 97.977,145.15 v1(97.977,144.82)
SSRX_P: U1.18 U2.23 | length 13.1
  Top Layer w0.161: U2.23 89.701,149.605 89.771,149.536 92.359,149.536 92.579,149.755 v1(92.94,149.755) ; U1.18 98.528,145.413 98.457,145.343 98.457,145.2 98.677,144.981 v1(98.677,144.82)
  Inner2 w0.13: v1(92.94,149.755) 93.27,149.755 93.505,149.52 94.809,149.52 98.442,145.888 98.442,145.385 98.677,145.15 v1(98.677,144.82)
SSTX_N: C18.2 U1.20 | length 13.3
  Top Layer w0.161: C18.2 92.227,147.551 92.605,147.929 93.059,147.929 93.398,147.589 93.398,147.279 v1(93.654,147.024) ; v1(99.177,143.12) 99.177,143.481 99.397,143.7 99.397,145.144 99.328,145.213 U1.20
  Inner2 w0.13: v1(93.654,147.024) 93.887,146.79 94.219,146.79 96.942,144.067 99.195,144.067 99.412,143.85 99.412,143.685 99.177,143.45 v1(99.177,143.12)
SSTX_P: C17.2 U1.21 | length 13.7
  Top Layer w0.161: C17.2 92.227,148.567 92.605,148.19 93.167,148.19 93.583,147.774 93.893,147.774 v1(94.148,147.519) ; U1.21 99.726,145.213 99.658,145.144 99.658,143.7 99.877,143.481 v1(99.877,143.12)
  Inner2 w0.13: v1(94.148,147.519) 94.382,147.285 94.382,146.953 97.037,144.297 99.29,144.297 99.642,143.945 99.642,143.685 99.877,143.45 v1(99.877,143.12)
SY1_FB: C67.1 R34.1 R35.2 U13.5 | length 5
  Top Layer w0.1: R35.2 104.497,152.933 C67.1 ; U13.5 104.315,154.751 104.764,154.302 C67.1 ; R34.1 104.876,153.088 C67.1
TX1_N: U1.3 USB2.A3 | length 9.4
  Top Layer w0.161: USB2.A3 96.434,155.476 96.553,155.356 96.553,154.392 97.245,153.7 98.709,153.7 100.197,152.212 100.197,149.704 100.128,149.635 U1.3
TX1_P: U1.2 USB2.A2 | length 9.4
  Top Layer w0.161: USB2.A2 96.934,155.476 96.814,155.356 96.814,154.5 97.353,153.961 98.817,153.961 100.458,152.32 100.458,149.704 100.527,149.635 U1.2
TX2_N: U1.4 USB2.B3 | length 15.6
  Top Layer w0.161: USB2.B3 93.184,158.305 v1(93.244,158.365) ; v1(98.785,152.697) 99.041,152.442 99.041,152.132 99.726,151.446 U1.4
  Inner2 w0.13: v1(93.244,158.365) 93.244,158.035 93.009,157.8 93.009,154 93.796,153.213 97.937,153.213 98.22,152.931 98.552,152.931 v1(98.785,152.697)
TX2_P: U1.5 USB2.B2 | length 15.6
  Top Layer w0.161: v1(92.544,158.365) 92.684,158.225 USB2.B2 ; v1(98.29,152.202) 98.546,151.947 98.856,151.947 99.397,151.407 99.397,149.704 99.328,149.635 U1.5
  Inner2 w0.13: v1(92.544,158.365) 92.544,158.035 92.779,157.8 92.779,153.905 93.701,152.983 97.842,152.983 98.057,152.768 98.057,152.436 v1(98.29,152.202)
VBUS_DET: R8.2 U2.10 | length 1.2
  Top Layer w0.127: U2.10 87.7,144.324 87.94,144.084 R8.2
VCC12: C1.2 C2.1 C3.1 C4.1 C5.1 C6.1 C14.1 L1.1 U2.7 U2.13 U2.24 U2.28 U2.36 U2.46 | length 35.8
  Top Layer w0.2: C5.1 82.992,152.123 84.1,151.015 84.1,150.264 83.973,150.137 83.973,145.661 84.173,145.461 86.497,145.461 ; C3.1 82.469,146.916 82.98,146.405 U2.46 83.972,146.405 ; U2.7 86.5,145.458 86.497,145.461 ; C2.1 87.886,152.081 v1(87.459,151.654) 87.3,151.495 U2.28 87.3,150.159 87.306,150.153 88.581,150.153 88.73,150.004 89.204,150.004 U2.24 ; U2.13 88.617,145.605 88.473,145.461 86.497,145.461 ; U2.24 89.854,150.005 90.073,150.224 C1.2 C6.1
  Top Layer w0.254: C4.1 79.287,147.133 C14.1@79.442,146.978
  Top Layer w0.3: L1.1@79.384,144.249 79.384,146.281 79.442,146.339 ; C14.1@79.442,146.978 79.442,146.339 ; C3.1 81.472,146.369 79.472,146.369 79.442,146.339
  Bottom Layer w0.3: v1(82.675,152.063) 83.348,151.39 87.239,151.39 87.459,151.61 v1(87.459,151.654)
VCC33: C7.1 C8.1 C9.1 C10.1 C11.1 C12.1 C15.2 C25.1 LED1.1 R16.2 U2.4 U2.12 U2.14 U2.18 U2.27 U2.34 U2.39 U4.3 U4.7 U4.8 | length 63.5
  Top Layer w0.127: C9.1 84.172,153.737 83.934,153.975 83.934,155.825 84.709,156.6 84.709,160.8 85.695,161.786 86.343,161.786 LED1.1
  Top Layer w0.2: C8.1@79.727,149.927 80.706,148.948 R16.2 81.041,148.838 81.947,147.932 C12.1 82.381,147.932 82.646,148.197 v1(82.646,148.421) 82.646,149.014 v1(82.66,149.028) 82.837,149.205 U2.39 ; C9.1 84.406,153.726 v1(84.406,152.64) v1(84.406,152.015) 84.406,151.642 84.9,151.148 U2.34 ; U2.4 85.3,143.502 85.859,142.943 v1(86.152,142.943) ; C10.1 85.974,154.3 87.93,154.3 88.628,153.602 88.628,151.953 88.231,151.556 88.087,151.556 87.7,151.169 U2.27 ; U2.18 88.752,147.605 88.611,147.464 88.611,146.091 88.697,146.005 U2.14 89.572,146.005 89.982,145.595
  Top Layer w0.254: C7.1 C8.1@79.727,149.927 ; C9.1@84.406,153.726 84.417,153.737 C10.1 ; v1(104.159,143.85) 104.174,143.865 U4.3 ; U4.7 U4.8 110.877,146.968 v1(110.909,147) 110.909,147.055 C11.1@111.509,147.655
  Inner1 w0.254: v1(90.11,144.503) 90.486,144.879 95.968,144.879 96.7,144.147 99.473,144.147 99.77,143.85 v1(104.159,143.85) 105.544,145.235 105.544,147.643 106.672,148.771 109.146,148.771 110.909,147.008 v1(110.909,147)
  other v1: 89.475,144.611 88.967,145.011 89.883,145.111 90.11,145.773 90.818,145.773
VL_CE: C32.1 R19.1 U1.25 | length 4.9
  Top Layer w0.127: U1.25 101.327,145.982 101.709,145.6 102.657,145.6 102.812,145.755 C32.1 103.209,144.133 R19.1
XI: C24.2 U2.25 X1.3 | length 9.8
  Top Layer w0.127: U2.25 88.5,151.055 89.209,151.764 89.209,153.791 88.616,154.384 C24.2
  Top Layer w0.2: X1.3 87.771,158.434 87.207,157.87 87.207,155.938 87.491,155.654 87.921,155.654 C24.2
XO: C24.1 U2.26 X1.1 | length 7.7
  Top Layer w0.127: C24.1 87.682,154.959 88.955,153.686 88.955,151.87 88.1,151.015 U2.26
  Top Layer w0.2: X1.1 86.089,156.396 C24.1
pads on no net: U1.11 U1.12 U1.14 U1.15 U1.22 U2.40 U2.41 U2.42 U2.43 U2.44 U2.45 U3.1 U3.3 U3.5 U3.6 U3.7 U3.8 U3.10 U3.11 U3.12 U3.13 U3.14 U3.16 U3.17 U3.19 U3.20 U3.22 U3.28 U3.30 U3.32 U3.36 U3.38 U3.42 U3.44 U3.45 U3.46 U3.47 U3.48 U3.49 U3.51 USB2.A8 USB2.B8

## Polygon pours and split planes (outlines as drawn)
no net on Inner2 (solid, remove dead copper): 126.709,137.1 ccw(c125.709,137.1) 124.709,137.1 ccw(c125.709,137.1)
no net on Inner1 (solid, remove dead copper): 126.709,137.1 ccw(c125.709,137.1) 124.709,137.1 ccw(c125.709,137.1)
no net on Bottom Layer (solid, remove dead copper, pour order 24): 126.709,137.1 ccw(c125.709,137.1) 124.709,137.1 ccw(c125.709,137.1)
no net on Top Layer (solid, remove dead copper, pour order 6): 126.709,137.1 ccw(c125.709,137.1) 124.709,137.1 ccw(c125.709,137.1)
GND on Inner2 (solid, remove dead copper): 76.209,164.2 137.801,164.2 137.801,76.2 76.209,76.2
GND on Inner1 (solid, remove dead copper): 76.209,164.2 137.87,164.2 137.87,76.2 76.209,76.2
GND on Bottom Layer (solid, remove dead copper, pour order 28): 76.209,164.2 137.676,164.2 137.676,76.2 76.209,76.2
GND on Top Layer (solid, remove dead copper, pour order 18): 76.209,164.2 137.659,164.2 137.659,76.2 76.209,76.2
3V3 on Bottom Layer (solid, remove dead copper, pour order 20): 89.637,134.99 89.764,135.117 109.449,135.117 109.576,134.99 109.576,133.974 109.449,133.847 89.891,133.847 89.637,134.101
VCC33 on Top Layer (solid, remove dead copper, pour order 0): 91.373,146.061 91.373,144.593 91.081,144.301 91.081,143.239 90.793,142.951 89.783,142.951 89.473,143.261 89.473,144.261 89.273,144.461 88.473,144.461 88.373,144.561 88.373,145.161 88.473,145.261 89.373,145.261 89.573,145.461 89.573,145.661 89.473,145.761 88.773,145.761 88.573,145.961 88.573,146.061 88.773,146.261 89.573,146.261 89.773,146.061
5V on Bottom Layer (solid, remove dead copper, pour order 22): 85.489,143.42 85.709,143.2 85.709,142.9 86.009,142.6 87.809,142.6 88.109,142.9 88.109,143.661 88.459,144.011 89.398,144.011 89.409,144 96.309,144 96.709,143.6 96.709,141.9 96.309,141.5 84.709,141.5 83.809,142.4 83.809,143.3 83.929,143.42
VCC33 on Inner1 (solid, remove dead copper): 82.109,148.313 82.49,147.932 82.871,147.932 83.125,148.186 83.125,150.218 83.887,150.98 88.078,150.98 88.713,150.345 88.713,144.231 89.683,143.261 89.683,143.06 89.221,142.598 87.316,142.598 86.554,143.36 86.046,143.36 85.665,142.979 85.665,142.217 86.173,141.709 89.892,141.709 91.081,142.898 91.081,150 89.394,151.687 84.958,151.687 84.776,151.869 84.776,152.758 84.649,152.885 84.141,152.885 84.014,152.758 84.014,152.219 82.109,150.314
$1N7428 on Top Layer (solid, remove dead copper, pour order 2): 83.843,145.769 83.843,145.348 82.927,144.432 82.927,142.526 82.772,142.371 81.351,142.371 81.021,142.701 81.021,145.519 81.27,145.769
5V on Top Layer (solid, remove dead copper, pour order 4): 85.614,142.678 85.614,143.36 84.649,143.36 84.268,143.741 84.268,145.138 84.141,145.265 83.969,145.265 83.072,144.368 83.072,143.042 83.436,142.678
5V on Bottom Layer (solid, remove dead copper, pour order 26): 93.509,160.15 101.109,160.15 102.509,158.75 102.509,152.6 101.809,151.9 100.409,151.9 99.209,153.1 97.626,153.1 97.039,152.513 94.246,152.513 93.307,153.452 93.307,154.248 93.809,154.75 94.259,154.75 94.509,154.5 94.509,153.708 94.795,153.422 95.883,153.422 96.794,154.332 99.491,154.332 100.359,155.2 100.359,157.53 99.279,158.61 93.492,158.61 93.151,158.95 93.151,159.792
$1N31844 on Top Layer (solid, remove dead copper, pour order 8): 111.209,158.6 111.709,158.1 111.709,156.6 111.409,156.3 105.809,156.3 105.709,156.4 105.709,157.791 106.518,158.6
5V on Top Layer (solid, remove dead copper, pour order 10): 95.009,144 96.409,144 96.809,143.6 96.809,142.449 96.56,142.2 95.129,142.2 94.809,142.52 94.809,143.8
5V on Top Layer (solid, remove dead copper, pour order 12): 101.248,161.008 102.206,161.008 103.213,162.015 103.991,162.015 104.301,161.706 104.301,156.292 104.109,156.1 103.909,156.1 102.309,154.5 102.309,152.4 101.809,151.9 101.075,151.9 100.309,152.666 100.309,160.069
3V3 on Top Layer (solid, remove dead copper, pour order 14): 107.809,155.1 111.335,155.1 111.605,154.83 111.605,152.795 110.259,151.45 110.259,148.02 109.674,147.435 108.575,147.435 108.409,147.601 108.409,152.6 107.609,153.4 107.609,154.9
5V on Top Layer (solid, remove dead copper, pour order 16): 93.724,159.851 96.258,159.851 96.459,159.65 96.459,155.75 96.209,155.5 95.709,155.5 95.609,155.6 95.609,158.3 95.346,158.564 94.206,158.564 93.942,158.3 93.942,155.317 94.559,154.7 94.559,153.495 94.386,153.322 93.587,153.322 93.059,153.85 93.059,157.7 93.459,158.1 93.459,159.586

## Keep-outs
Board Outline Layer:
  lines w0.127: 113.409,81.8 115.409,81.8 115.409,157.8 113.409,157.8 113.409,82 ; 76.209,76.2 113.409,76.2 113.409,77.8 115.409,77.8 120.409,77.8 121.409,77.8 122.409,77.8 127.409,77.8 127.409,115 122.409,115 120.409,115 120.409,125.4 122.409,125.4 127.409,125.4 127.409,139.3 123.909,139.3 123.909,144 123.909,148.7 127.409,148.7 127.409,162.6 122.409,162.6 120.409,162.6 115.409,162.6 114.409,162.6 113.409,162.6 113.409,164.2 76.209,164.2 76.209,81 76.209,76.2 ; 120.409,81.9 120.409,110.6 122.409,110.6 122.409,81.9 120.409,81.9 ; 120.409,129 122.409,129 122.409,157.8 120.409,157.8 120.409,129

## Silkscreen, mask and mechanical layers (free items; w line width, h text height)
Top Silkscreen Layer:
  text "2502" at 77.909,156.35 h2.5
  text "V1.3" at 78.009,154.2 h2.5
Bottom Silkscreen Layer:
  region: 5 vertices and 1 holes, not listed, extent 76.2,76.206 127.412,164.208
Top Solder Mask Layer:
  region: 126.709,137.1 ccw(c125.709,137.1) 124.709,137.1 ccw(c125.709,137.1)
  text "by_xljxlj" at 84.059,158.15 h1 r90
Bottom Solder Mask Layer:
  region: 126.709,137.1 ccw(c125.709,137.1) 124.709,137.1 ccw(c125.709,137.1)
Mech6:
  lines w0.127: 77.809,162.6 111.809,162.6
  text "H=1.6_JLC7628" at 76.259,164.6 h4